# Altium PCB Holiday r2.PcbDoc (part 1 of 3)
Units mil, origin at the board's own origin, x right, y up, seen from the top; angles counter-clockwise.
Board outline 2637.8 x 2637.8 mil, 4 copper layers (Top Layer, Mid-Layer 1, InternalPlane1, Bottom Layer), stack 63.08 mil thick; 132 components, 142 nets, 636 pads, 407 vias.
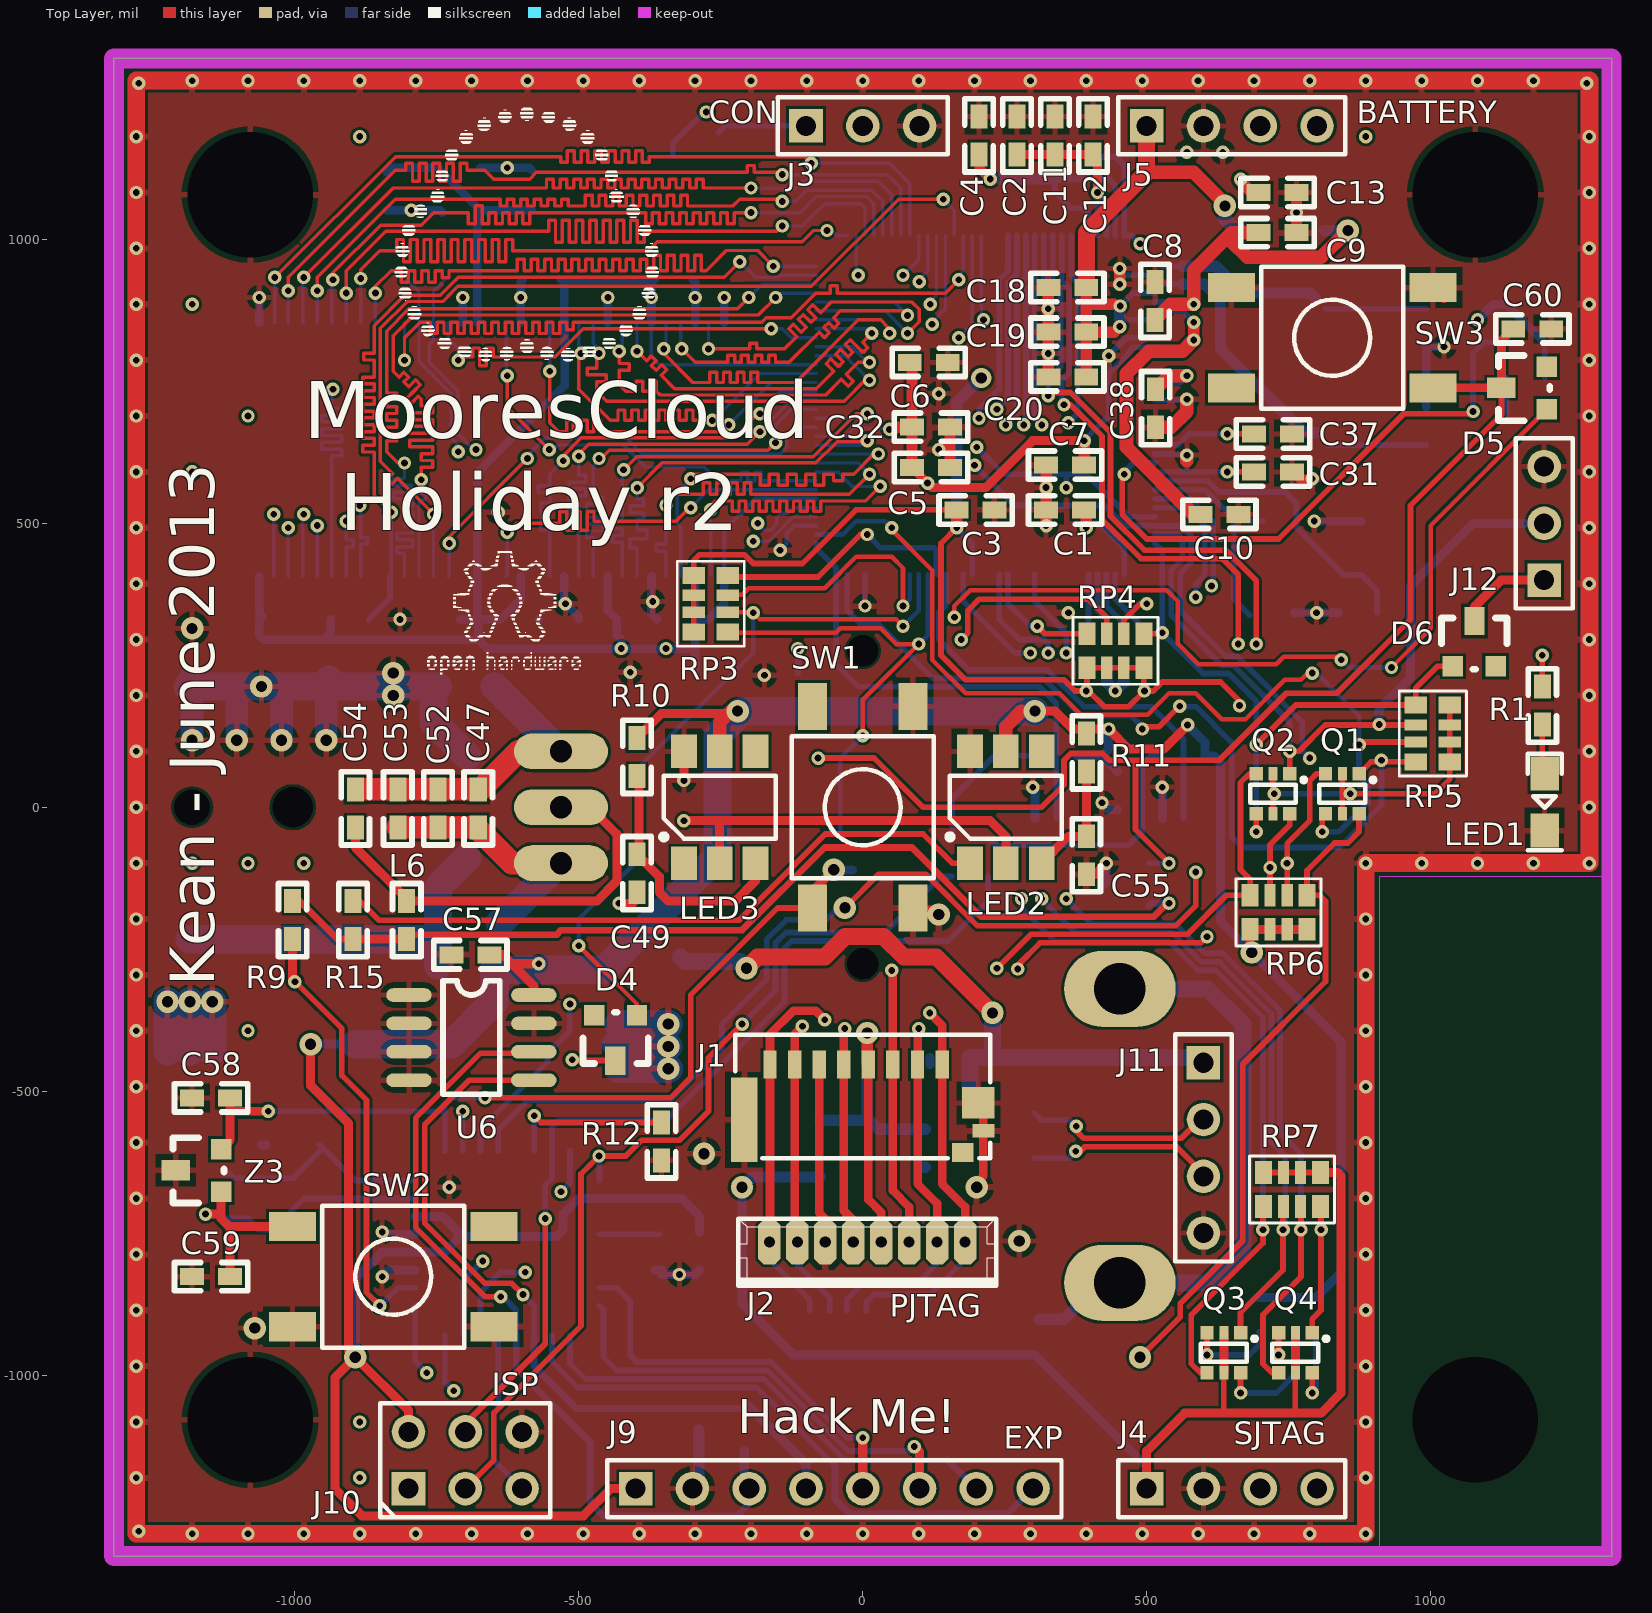
[diagram p0: Top Layer view]
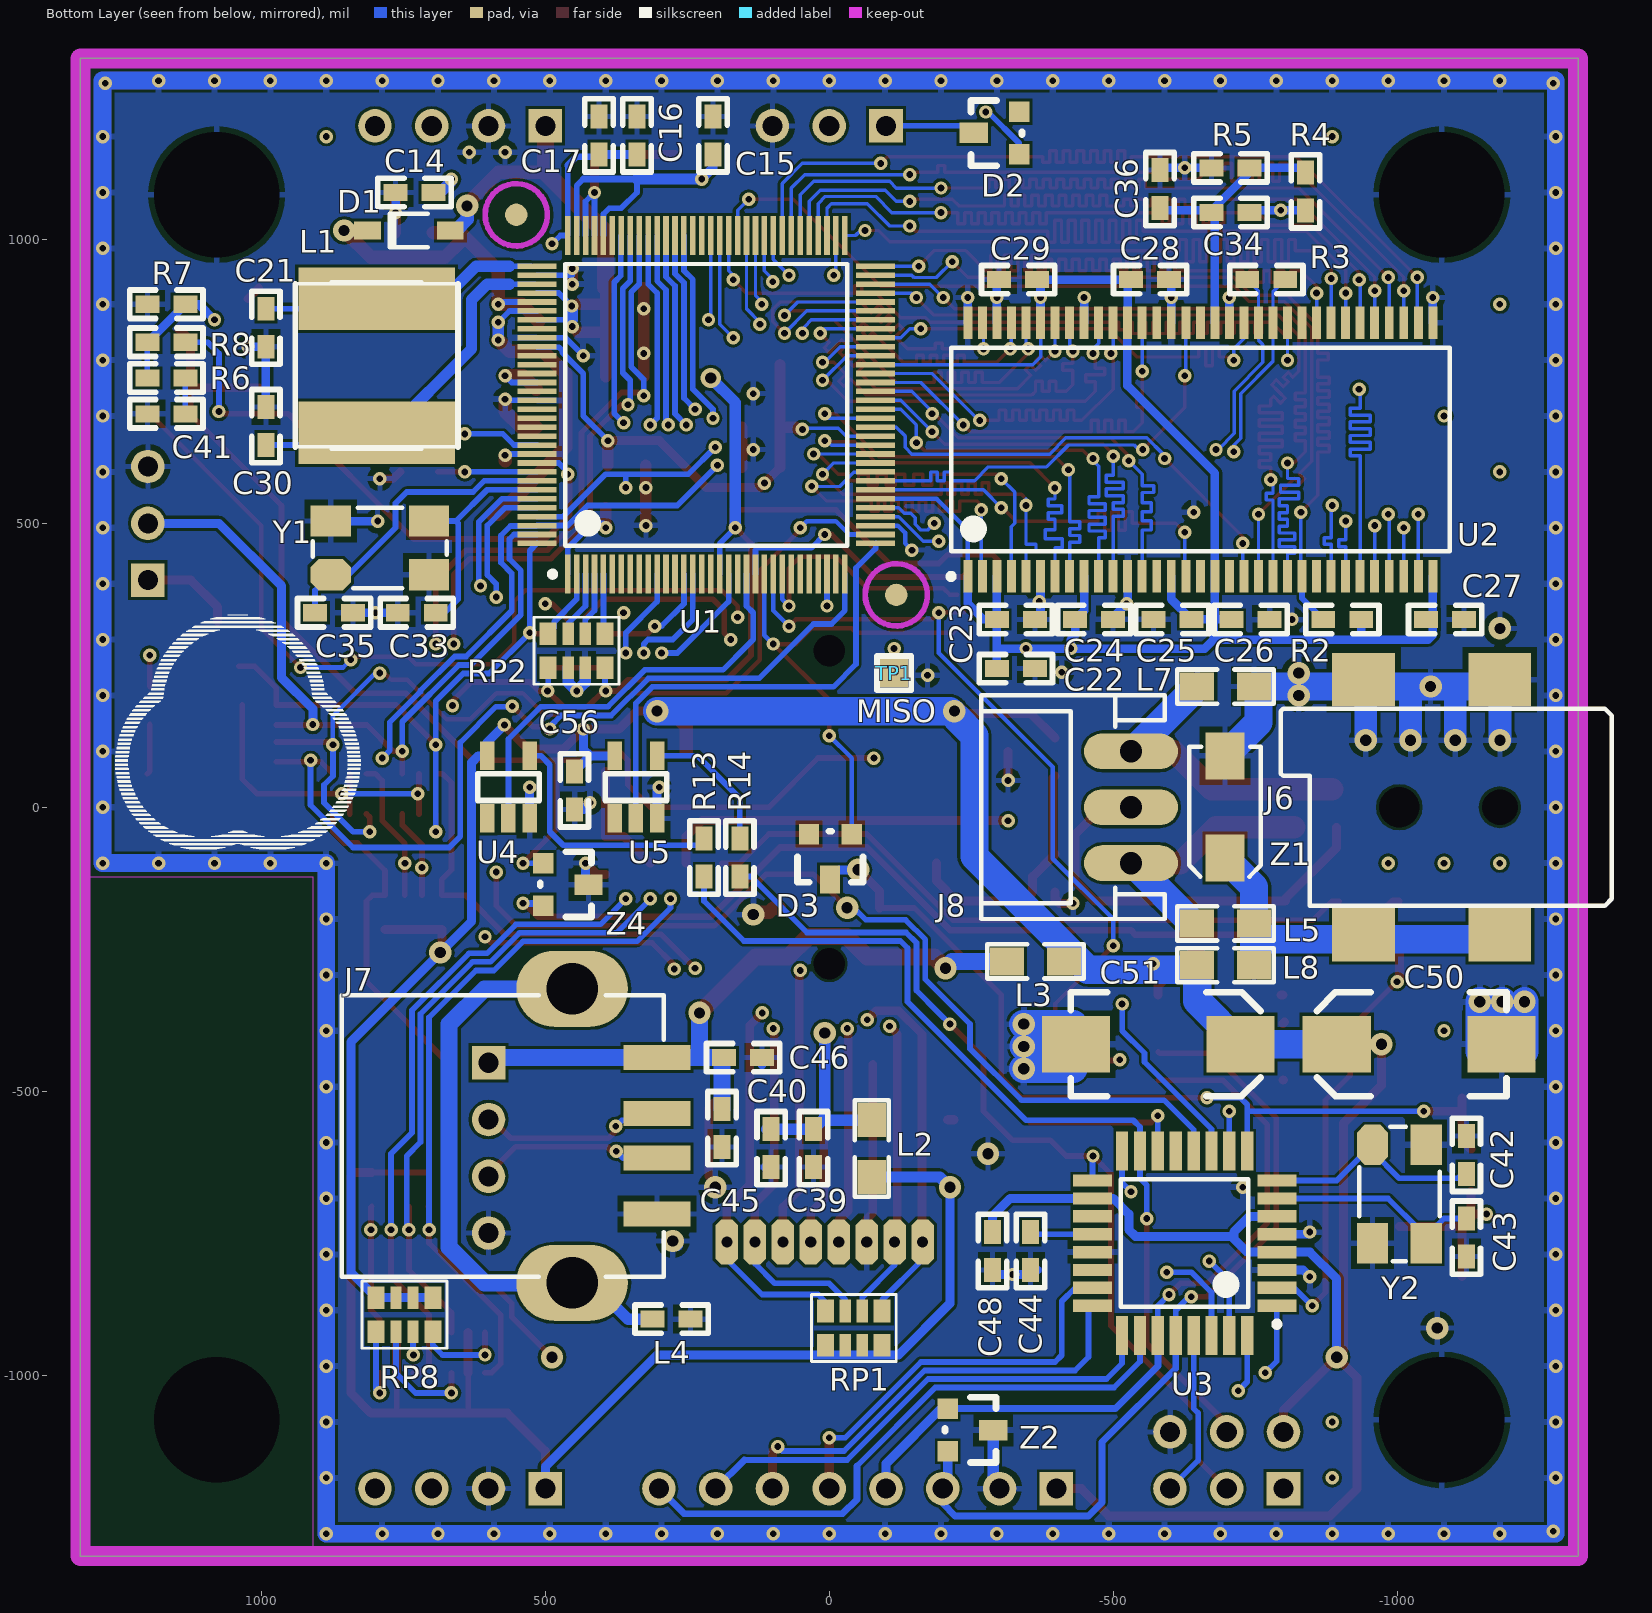
[diagram p1: Bottom Layer view, seen from below]
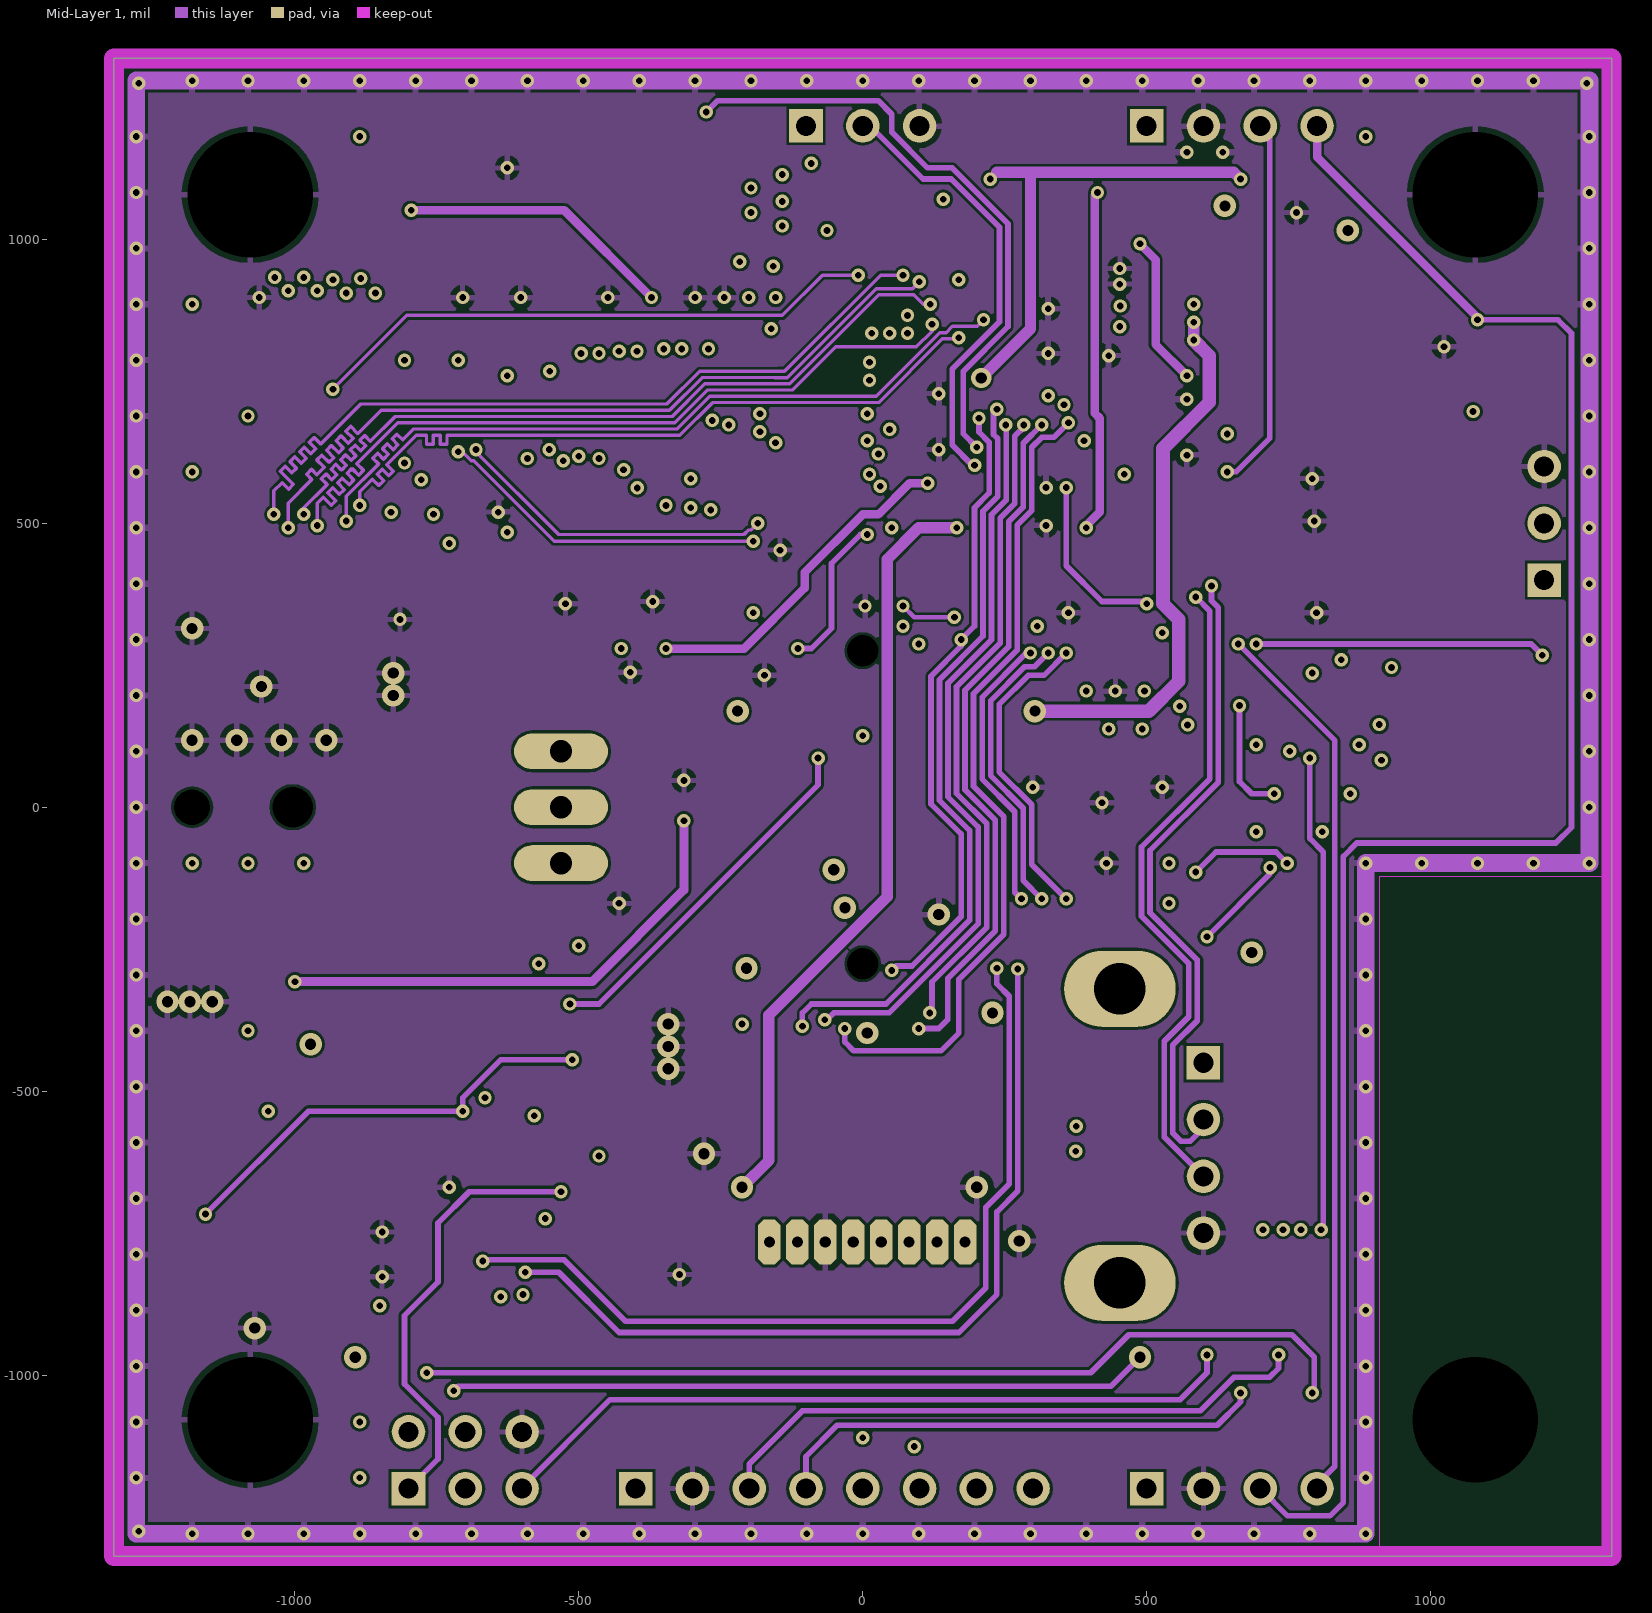
[diagram p2: Mid-Layer 1]
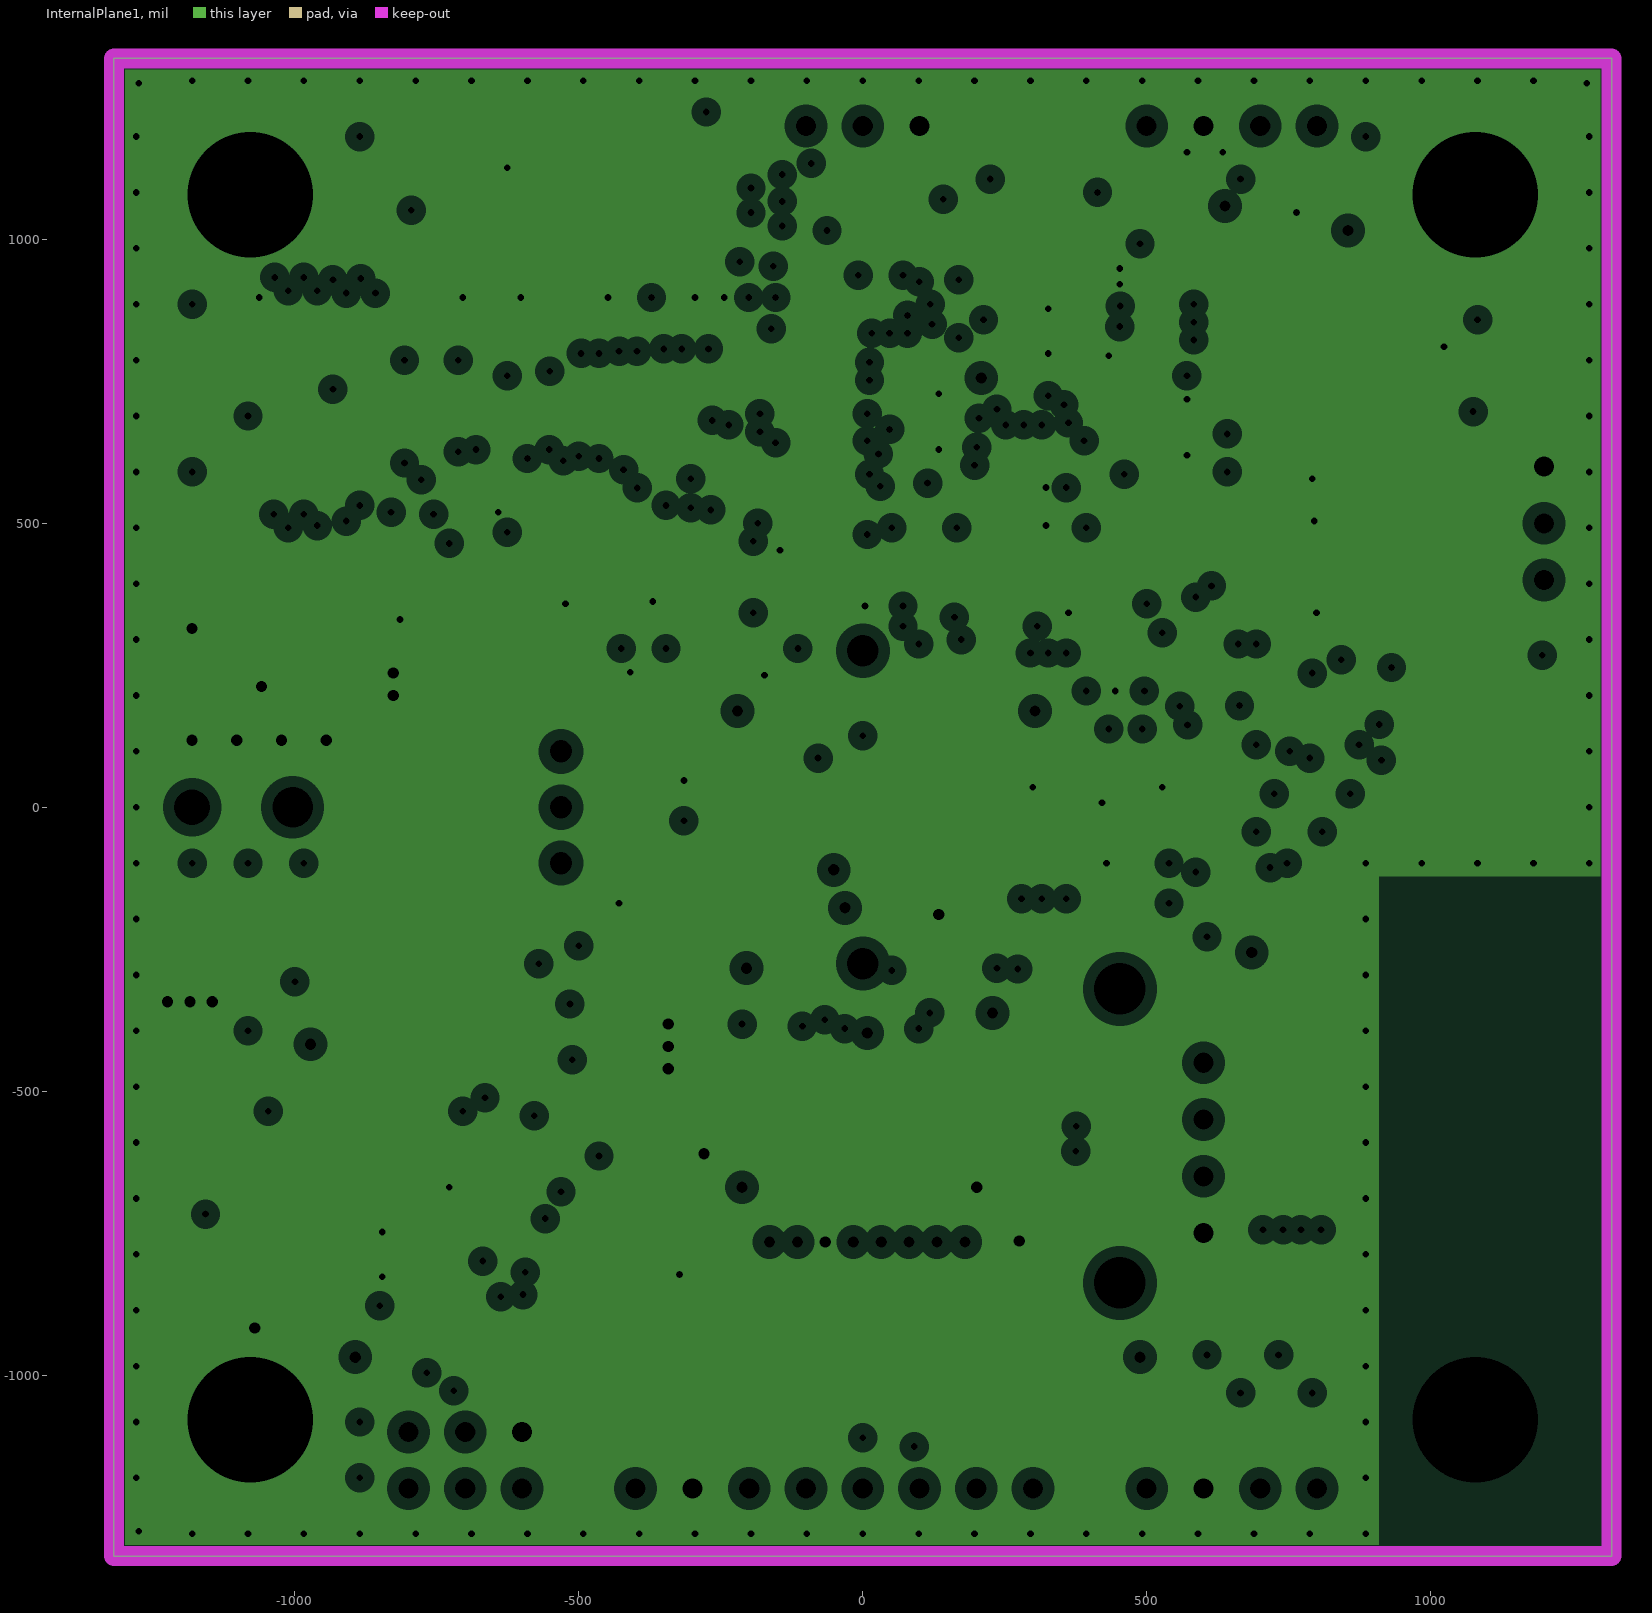
[diagram p3: InternalPlane1, clearances drawn from the general rule]

## Layer stack, top to bottom
Top Layer: signal copper 1.4
Dielectric: prepreg 12.9921, FR-4, Dk 4.8
Mid-Layer 1: signal copper 1.4
Dielectric: prepreg 31.4961, FR-4, Dk 4.8
InternalPlane1: plane copper 1.4, net GND
Dielectric: core 12.9921, FR-4, Dk 4.8
Bottom Layer: signal copper 1.4

## Board outline
-1318.9,-1318.9 -1318.9,1318.9 1318.9,1318.9 1318.9,-1318.9

## Design rules (kind name [scope] priority, off if disabled: settings)
Clearance ClearanceUSB [(InDifferentialPairClass('USB') AND IsTrack)] p1 off: gap=6
Clearance [All] p2: gap=5
DiffPairsRouting [(InNetClass('DDR_CLK') OR InNet('USB_D_N') OR InNet('USB_D_P'))] p1: maxlimit=10 minlimit=10 mostfreqgap=10 maxuncoupledlength=500
HoleSize [All] p1: absolutevalues=TRUE maxlimit=236.22 minlimit=1 maxpercent=80.000 minpercent=20.000
MatchedLengths MatchedLengthsUSB [InNetClass('USB')] p1: tolerance=9.84 checknetsindiffpair=TRUE checkdiffpairvsdiffpair=TRUE checkothers=TRUE
MatchedLengths MatchedLengthsDDR_CLK [InNetClass('DDR_CLK')] p2: tolerance=3.94 checknetsindiffpair=TRUE checkdiffpairvsdiffpair=TRUE checkothers=TRUE
MatchedLengths MatchedLengthsDDR_CTL [(InNetClass('DDR_ADDR') OR InNetClass('DDR_CTL'))] p3: tolerance=19.68 checknetsindiffpair=TRUE checkdiffpairvsdiffpair=TRUE checkothers=TRUE
MatchedLengths MatchedLengthsDDR_DATA [InNetClass('DDR_DATA')] p4: tolerance=9.84 checknetsindiffpair=TRUE checkdiffpairvsdiffpair=TRUE checkothers=TRUE
MaxMinImpedance MaxMinImpedanceUSB [InDifferentialPairClass('USB')] p1: minimum=85.00 maximum=95.00
MinimumSolderMaskSliver [All] p1: minsoldermaskwidth=4
PlaneClearance [All] p1: clearance=20
PlaneConnect [All] p1: planeconnectstyle=Direct reliefexpansion=20 reliefentries=4 reliefconductorwidth=12.01 reliefairgap=10
PolygonConnect [All] p1: connectstyle=Relief reliefconductorwidth=10 reliefentries=4 polygonreliefangle="90 Angle" airgapwidth=10
RoutingVias [All] p1: holewidth=11.81 width=23.62 viastyle="Through Hole" minholewidth=11.81 minwidth=23.62 maxholewidth=39.37 maxwidth=50
SilkToSilkClearance [All] p1: silktosilkclearance=0
SilkToSolderMaskClearance [IsPad] p1: minsilkscreentomaskgap=0.79 clearancetoexposedcopper=TRUE
SolderMaskExpansion [All] p1: expansion=4
Width [All] p1: maxlimit=50 minlimit=6 preferedwidth=10
21 further rules are at their usual default settings.

## Classes and differential pairs
net class D[0..15]: D0 D1 D2 D3 D4 D5 D6 D7 D8 D9 D10 D11 D12 D13 D14 D15
net class A[0..12]: A0 A1 A2 A3 A4 A5 A6 A7 A8 A9 A10 A11 A12
component class "Holiday Aux r2": C42 C43 C44 C45 C46 C47 C48 C49 C50 C51 C52 C53 C54 C55 C57 C58 C59 C60 D3 D4 D5 J6 J7 J8 J9 J10 J11 L3 L4 L5 L6 L7 L8 LED2 LED3 R9 R10 R11 R12 R15 RP3 SW1 SW2 SW3 U3 U6 Y2 Z1 Z2 Z3 Z4
net class DDR_DATA: D0 D1 D2 D3 D4 D5 D6 D7 D8 D9 D10 D11 D12 D13 D14 D15 DQM0 DQM1 DQS0 DQS1
net class DDR_ADDR: A0 A1 A2 A3 A4 A5 A6 A7 A8 A9 A10 A11 A12
differential pair class DDR_CLK: CLK
differential pair class USB: USB_D
net class DDR_CLK: CLK_N CLK_P
net class DDR_CTL: BA0 BA1 CAS_N CKE CS_N RAS_N WE_N
differential pair CLK: +CLK_P -CLK_N
differential pair USB_D: +USB_D_P -USB_D_N

## Components (designator, comment, footprint, x,y, rotation, side; value= is the part's Value field where it differs from the comment)
C1 "22u" ARA_0603 389.76,523.62 r180 top
C2 "22u" ARA_0603 271.65,1149.61 r90 top
C3 "22u" ARA_0603 165.35,523.62 r0 top
C4 "22u" ARA_0603 204.72,1149.61 r90 top
C5 "22u" ARA_0603 86.61,598.43 r0 top
C6 "22u" ARA_0603 82.68,783.46 r0 top
C7 "100n" ARA_0603 389.76,602.36 r180 top
C8 "22u" ARA_0603 514.76,858.27 r90 top
C9 "22u" ARA_0603 696.85,1011.81 r0 top
C10 "22u" ARA_0603 594.49,515.75 r0 top
C11 "22u" ARA_0603 338.58,1149.61 r90 top
C12 "100n" ARA_0603 405.51,1149.61 r90 top
C13 "22u" ARA_0603 696.85,1082.68 r0 top
C14 "22u" ARA_0603 696.85,1082.68 r0 bottom
C15 "100n" ARA_0603 204.72,1149.61 r90 bottom
C16 "22u" ARA_0603 338.58,1149.61 r90 bottom
C17 "100n" ARA_0603 405.51,1149.61 r90 bottom
C18 "22u" ARA_0603 393.7,915.35 r180 top
C19 "22u" ARA_0603 393.7,836.61 r180 top
C20 "22u" ARA_0603 393.7,757.87 r180 top
C21 "10p (DNP)" ARA_0603 992.13,877.95 r270 bottom
C22 "100n" ARA_0603 -295.28,244.09 r180 bottom
C23 "100n" ARA_0603 -295.28,330.71 r180 bottom
C24 "100n" ARA_0603 -433.07,330.71 r180 bottom
C25 "100n" ARA_0603 -637.8,330.71 r0 bottom
C26 "100n" ARA_0603 -708.66,330.71 r180 bottom
C27 "100n" ARA_0603 -1051.18,330.71 r180 bottom
C28 "100n" ARA_0603 -531.5,929.13 r180 bottom
C29 "100n" ARA_0603 -366.14,929.13 r0 bottom
C30 "10p" ARA_0603 992.13,637.8 r90 bottom
C31 "100n" ARA_0603 688.98,590.55 r0 top
C32 "100n" ARA_0603 86.61,669.29 r0 top
C33 "18p" ARA_0603 692.91,342.52 r0 bottom
C34 "100n" ARA_0603 -740.16,1047.24 r0 bottom
C35 "18p" ARA_0603 905.51,342.52 r180 bottom
C36 "100n" ARA_0603 -582.68,1055.12 r90 bottom
C37 "1u" ARA_0603 688.98,657.48 r0 top
C38 "100n" ARA_0603 515.75,736.22 r270 top
C39 "22u" ARA_0603 27.56,-566.93 r270 bottom
C40 "22u" ARA_0603 102.36,-566.93 r270 bottom
C41 "100n" ARA_0603 1133.86,692.91 r0 bottom
C42 "18p" ARA_0603 -1122.05,-645.67 r90 bottom
C43 "18p" ARA_0603 -1122.05,-724.41 r270 bottom
C44 "100n" ARA_0603 -354.33,-748.03 r270 bottom
C45 "22u" ARA_0603 188.98,-531.5 r270 bottom
C46 "100n" ARA_0603 185.04,-440.94 r180 bottom
C47 "100n" ARA_0603 -677.17,31.5 r270 top
C48 "100n" ARA_0603 -287.4,-748.03 r270 bottom
C49 "100n (DNP)" ARA_0603 -397.64,-149.61 r90 top
C50 "100uF, 10V, Tant" ARA_TAJD -893.7,-417.32 r180 bottom
C51 "100uF, 10V, Tant" ARA_TAJD -724.41,-417.32 r0 bottom
C52 "22u" ARA_0603 -748.03,-35.42 r90 top
C53 "22u" ARA_0603 -818.9,-35.42 r90 top
C54 "10p (DNP)" ARA_0603 -893.7,31.48 r270 top
C55 "100n (DNP)" ARA_0603 393.7,-118.11 r90 top
C56 "100n" ARA_0603 448.82,-3.94 r90 bottom
C57 "100n" ARA_0603 -657.48,-259.84 r180 top
C58 "1u (DNP)" ARA_0603 -1181.1,-511.81 r0 top
C59 "1u (DNP)" ARA_0603 -1181.1,-826.77 r0 top
C60 "1u (DNP)" ARA_0603 1212.6,842.52 r180 top
D1 "1N5819 (DNP)" SOD-123 740.16,1015.75 r0 bottom
D2 "BAT54" ARA_SOT-23 -334.65,1149.61 r90 bottom
D3 "BAT54" ARA_SOT-23 -39.37,-47.24 r0 bottom
D4 "BAT54" ARA_SOT-23 -397.64,-366.14 r180 top
D5 "BAT54" ARA_SOT-23 1204.72,700.79 r90 top
D6 "BAT54" ARA_SOT-23 1039.37,248.03 r0 top
J1 "microSD" "MICROSD-47309-3751 WITH CARD" -11.81,-452.76 r0 top locked
J2 "PJTAG" 53047-08 7.87,-783.46 r0 top locked
J3 "CON" HDR1X3 -100,1200 r180 top locked
J4 "SJTAG" HDR1X4 500,-1200 r180 top locked
J5 "BATTERY" HDR1X4 500,1200 r180 top locked
J6 "DC JACK" PJ-002AH-SMT -1003.94,0 r0 bottom locked
J7 "USB A Female" "USB-A-FEMALE-SMT NANO WIFI" 452.76,-578.74 r270 bottom locked
J8 "JST S3B-EH" "JST-EH-S3B WITH PLUG" -531.5,0 r90 bottom locked
J9 "EXP" HDR1X8 -400,-1200 r180 top locked
J10 "ISP" HDR2x3 -800,-1200 r180 top locked
J11 "USBTST" HDR1X4 600,-450 r90 top locked
J12 "ACOM" HDR1X3 1200,400 r270 top
L1 "22uH 1.5A" RCL_L7078 797.24,777.56 r90 bottom
L2 "470nH" ARA_0805 -74.8,-551.18 r270 bottom
L3 "600R 1.5A" ARA_0805 -413.39,-271.65 r0 bottom
L4 "750R 200mA" ARA_0603 244.09,-901.57 r0 bottom
L5 "120R 3.5A" ARA_0805 -748.03,-204.72 r0 bottom
L6 "750R 200mA" ARA_0603 -803.15,-232.28 r90 top
L7 "120R 3.5A" ARA_0805 -748.03,212.6 r0 bottom
L8 "600R 1.5A" ARA_0805 -648,-278 r180 bottom
LED1 "Green (DNP)" LED_0805 1200.79,59.06 r270 top locked
LED2 "WS2812 (DNP)" PLCC6-IPC 251.97,0 r90 top locked
LED3 "WS2812 (DNP)" PLCC6-IPC -251.97,0 r90 top locked
Q1 "BSS138PS" ARA_SOT-363 874.02,59.06 r180 top
Q2 "BSS138PS" ARA_SOT-363 751.97,59.06 r180 top
Q3 "BSS138PS" ARA_SOT-363 665.35,-925.2 r180 top
Q4 "BSS138PS" ARA_SOT-363 791.34,-925.2 r180 top
R1 "1k (DNP)" ARA_0603 1196.85,145.67 r90 top
R2 "10k" ARA_0603 -870.08,330.71 r180 bottom
R3 "120R" ARA_0603 -736.22,929.13 r180 bottom
R4 "1k" ARA_0603 -838.58,1118.11 r270 bottom
R5 "1k" ARA_0603 -740.16,1125.98 r0 bottom
R6 "1k" ARA_0603 1133.86,755.91 r0 bottom
R7 "100k" ARA_0603 1200.79,885.83 r180 bottom
R8 "1k" ARA_0603 1133.86,818.9 r0 bottom
R9 "0R" ARA_0603 -1003.94,-165.35 r270 top
R10 "100R (DNP)" ARA_0603 -397.64,55.12 r90 top
R11 "100R (DNP)" ARA_0603 393.7,62.99 r90 top
R12 "10k" ARA_0603 -354.33,-622.05 r90 top
R13 "1k" ARA_0603 220.47,-122.05 r90 bottom
R14 "1k" ARA_0603 157.48,-122.05 r90 bottom
R15 "0R (DNP)" ARA_0603 -897.64,-232.27 r90 top
RP1 "100k" RESPACK_0603x4 -43.31,-917.32 r270 bottom
RP2 "10k" RESPACK_0603x4 444.88,275.59 r270 bottom
RP3 "10k" RESPACK_0603x4 -267.72,358.27 r180 top
RP4 "10k" RESPACK_0603x4 444.88,275.59 r270 top
RP5 "10k" RESPACK_0603x4 1003.94,129.92 r0 top
RP6 "10k" RESPACK_0603x4 732.28,-185.04 r270 top
RP7 "10k" RESPACK_0603x4 755.91,-673.23 r90 top
RP8 "10k" RESPACK_0603x4 748.03,-893.7 r90 bottom
SW1 "TACTILE_SWITCH" TACTILE_SWITCH_SMD 0,0 r90 top locked
SW2 "TACTILE_SWITCH" TACTILE_SWITCH_SMD -826.77,-826.77 r0 top locked
SW3 "TACTILE_SWITCH" TACTILE_SWITCH_SMD 826.77,826.77 r180 top locked
TP1 "MISO" SMD_TESTTERMINAL -114.17,236.22 r180 bottom
U1 "MCIMX233DAG4B" LQFP128 216.54,708.66 r90 bottom locked
U2 "H5DU5162ETR-E3C" TSOP-II-66 -653.54,629.92 r90 bottom locked
U3 "ATMEGA328" TQFP32 -625.98,-767.72 r0 bottom locked
U4 "MC74VHC1GT50" ARA_SOT-23-5L 602.36,-19.68 r180 bottom
U5 "MC74VHC1GT50" ARA_SOT-23-5L 377.95,-19.68 r180 bottom
U6 "8kB EEPROM" SO-8 -799.21,-330.71 r180 top
Y1 "24Mhz" CRYSTAL_ABMM2 791.34,456.69 r180 bottom
Y2 "16MHz" CRYSTAL_ABMM2 -1003.94,-681.1 r270 bottom
Z1 "SMBJ TVS" ARA_DO-214AC -696.85,90.55 r270 bottom
Z2 "GSOT05C" ARA_SOT-23 -208.66,-1059.06 r270 bottom
Z3 "GSOT05C" ARA_SOT-23 -1129.92,-677.17 r90 top
Z4 "GSOT05C" ARA_SOT-23 503.94,-98.43 r270 bottom

## Footprints (in the part's own frame and the unit in brackets; to place one, negate y for a bottom-side part, rotate by r counter-clockwise, add the part's x,y. Pads: shape width x height; smd on the part's side, far side on the other; paste and mask are expansions set on the pad)
53047-08 [mm]
  oct 1.008x2.016 hole 0.5: 1(4.375,0.45) 2(3.125,0.45) 3(1.875,0.45) 4(0.625,0.45) 5(-0.625,0.45) 6(-1.875,0.45) 7(-3.125,0.45) 8(-4.375,0.45)
  silkscreen extent -5.77,-1.5 5.78,1.5
ARA_0603 [mil]
  rect 42x30 smd: 1(0,0) 2(66.91,0)
  silkscreen extent -31,-25 98,25, body extent 0,-16 67,16, height 20
ARA_0805 [mil]
  rect 60x50 smd: 1(0,0) 2(100,0)
  silkscreen extent -35,-30 135,30, body extent 0,-24 102,24, height 24
ARA_DO-214AC [mm]
  rect 2.1x1.75 smd: 1(0,0) 2(4.572,0)
  silkscreen extent -0.4,-1.6 5.4,1.6, body extent -0.4,-1.6 4.9,1.6, height 2.3
ARA_SOT-23 [mil]
  rect 36x36 smd: 1(0,0) 2(75,0)
  rect 36x50 smd: 3(38,80)
  silkscreen extent -20,-5 95,85, body extent -26,8 101,71, height 39
ARA_SOT-23-5L [mm]
  rect 0.65x1.27 smd: 1(0,0) 2(0.95,0) 3(1.9,0) 4(1.9,2.8) 5(0,2.8)
  silkscreen extent -0.43,0.8 2.32,2, body extent -0.42,0.8 2.32,2, height 1.45
ARA_SOT-363 [mm] "SOT-363/SC-88"
  rect 0.6x0.6 smd paste-0.05 mask+0.05: 1(0,0) 3(1.5,0) 4(1.5,1.8) 6(0,1.8)
  rect 0.4x0.6 smd paste-0.05 mask+0.05: 2(0.75,0) 5(0.75,1.8)
  silkscreen extent -0.72,0.18 1.78,1.3, body extent -0.25,0.25 1.75,1.55, height 0.95
ARA_TAJD [mil]
  rect 120x100 smd: 1(0,0) 2(290,0)
  silkscreen extent -35,-92 299,92, body extent 0,-85 287,85, height 115
CRYSTAL_ABMM2 [mm] "Abracon ABMM2 Low Profile Quartz Crystal"
  oct 1.8x1.4 smd: 1(-2.2,-1.2)
  rect 1.8x1.4 smd: 2(2.2,-1.2) 3(2.2,1.2) 4(-2.2,1.2)
  silkscreen extent -3,-1.8 3,1.8, body extent -3,-1.8 3,1.8, height 1.2
HDR1X3 [mm] "Connector; Header; 3 Position"
  rect 1.5x1.5 hole 0.9: 1(0,0)
  round 1.5 hole 0.9: 2(-2.54,0) 3(-5.08,0)
  silkscreen extent -6.35,-1.27 1.27,1.27
HDR1X4 [mm] "Connector; Header; 4 Position"
  rect 1.5x1.5 hole 0.9: 1(0,0)
  round 1.5 hole 0.9: 2(-2.54,0) 3(-5.08,0) 4(-7.62,0)
  silkscreen extent -8.89,-1.27 1.27,1.27
HDR1X8 [mm] "Connector; Header; 8 Position"
  rect 1.5x1.5 hole 0.9: 1(0,0)
  round 1.5 hole 0.9: 2(-2.54,0) 3(-5.08,0) 4(-7.62,0) 5(-10.16,0) 6(-12.7,0) 7(-15.24,0) 8(-17.78,0)
  silkscreen extent -19.05,-1.27 1.27,1.27
HDR2x3 [mm] "Connector; Header; 6 Position; Dual Row"
  rect 1.5x1.5 hole 0.9: 1(0,0)
  round 1.5 hole 0.9: 2(0,-2.54) 3(-2.54,0) 4(-2.54,-2.54) 5(-5.08,0) 6(-5.08,-2.54)
  silkscreen extent -6.35,-3.81 1.27,1.27
"JST-EH-S3B WITH PLUG" [mm] "JST EH Side Entry 3 way - with plug"
  oval 1.6x4.2 hole 1: 1(-2.5,0) 2(0,0) 3(2.5,0)
  silkscreen extent -5,-1.5 5,6.7, body extent -5,-1.5 5,8.85, height 4.35
LED_0805 [mil]
  rect 60x50 smd: A(0,0) K(100,0)
  silkscreen extent -35,-30 135,30, body extent 0,-24 102,24, height 24
LQFP128 [mm] "LQFP, 128-Leads, Body 14.00x14.00mm, Pitch 0.40mm, IPC Medium Density"
  rect 1.75x0.25 smd: 1(-7.575,6.2) 2(-7.575,5.8) 3(-7.575,5.4) 4(-7.575,5) 5(-7.575,4.6) 6(-7.575,4.2) 7(-7.575,3.8) 8(-7.575,3.4) 9(-7.575,3) 10(-7.575,2.6) 11(-7.575,2.2) 12(-7.575,1.8) 13(-7.575,1.4) 14(-7.575,1) 15(-7.575,0.6) 16(-7.575,0.2) 17(-7.575,-0.2) 18(-7.575,-0.6) 19(-7.575,-1) 20(-7.575,-1.4) 21(-7.575,-1.8) 22(-7.575,-2.2) 23(-7.575,-2.6) 24(-7.575,-3) 25(-7.575,-3.4) 26(-7.575,-3.8) 27(-7.575,-4.2) 28(-7.575,-4.6) 29(-7.575,-5) 30(-7.575,-5.4) 31(-7.575,-5.8) 32(-7.575,-6.2) 65(7.575,-6.2) 66(7.575,-5.8) 67(7.575,-5.4) 68(7.575,-5) 69(7.575,-4.6) 70(7.575,-4.2) 71(7.575,-3.8) 72(7.575,-3.4) 73(7.575,-3) 74(7.575,-2.6) 75(7.575,-2.2) 76(7.575,-1.8) 77(7.575,-1.4) 78(7.575,-1) 79(7.575,-0.6) 80(7.575,-0.2) 81(7.575,0.2) 82(7.575,0.6) 83(7.575,1) 84(7.575,1.4) 85(7.575,1.8) 86(7.575,2.2) 87(7.575,2.6) 88(7.575,3) 89(7.575,3.4) 90(7.575,3.8) 91(7.575,4.2) 92(7.575,4.6) 93(7.575,5) 94(7.575,5.4) 95(7.575,5.8) 96(7.575,6.2)
  rect 0.25x1.75 smd: 33(-6.2,-7.575) 34(-5.8,-7.575) 35(-5.4,-7.575) 36(-5,-7.575) 37(-4.6,-7.575) 38(-4.2,-7.575) 39(-3.8,-7.575) 40(-3.4,-7.575) 41(-3,-7.575) 42(-2.6,-7.575) 43(-2.2,-7.575) 44(-1.8,-7.575) 45(-1.4,-7.575) 46(-1,-7.575) 47(-0.6,-7.575) 48(-0.2,-7.575) 49(0.2,-7.575) 50(0.6,-7.575) 51(1,-7.575) 52(1.4,-7.575) 53(1.8,-7.575) 54(2.2,-7.575) 55(2.6,-7.575) 56(3,-7.575) 57(3.4,-7.575) 58(3.8,-7.575) 59(4.2,-7.575) 60(4.6,-7.575) 61(5,-7.575) 62(5.4,-7.575) 63(5.8,-7.575) 64(6.2,-7.575) 97(6.2,7.575) 98(5.8,7.575) 99(5.4,7.575) 100(5,7.575) 101(4.6,7.575) 102(4.2,7.575) 103(3.8,7.575) 104(3.4,7.575) 105(3,7.575) 106(2.6,7.575) 107(2.2,7.575) 108(1.8,7.575) 109(1.4,7.575) 110(1,7.575) 111(0.6,7.575) 112(0.2,7.575) 113(-0.2,7.575) 114(-0.6,7.575) 115(-1,7.575) 116(-1.4,7.575) 117(-1.8,7.575) 118(-2.2,7.575) 119(-2.6,7.575) 120(-3,7.575) 121(-3.4,7.575) 122(-3.8,7.575) 123(-4.2,7.575) 124(-4.6,7.575) 125(-5,7.575) 126(-5.4,7.575) 127(-5.8,7.575) 128(-6.2,7.575)
  silkscreen extent -7.7,-6.3 6.3,7, body extent -7,-7 7,7, height 1.6
"MICROSD-47309-3751 WITH CARD" [mm] "Molex MicroSD Connector - Push/Pull - 3.75mm with Card"
  rect 0.6x1.25 smd: 1(3.85,0) 2(2.75,0) 3(1.65,0) 4(0.55,0) 5(-0.55,0) 6(-1.65,0) 7(-2.75,0) 8(-3.85,0)
  rect 1.2x3.79 smd: G1(-5,-2.48)
  rect 1.45x1.4 smd: G2(5.475,-1.725)
  rect 1x0.6 smd: G3(5.7,-2.975)
  rect 0.95x0.85 smd: G4(4.775,-3.95)
  silkscreen extent -5.4,-4.2 6,1.32, body extent -5.4,-14 6.1,1.4, height 3.75
PJ-002AH-SMT [mm] "CUI High Current SMT DC Jack"
  round 0 hole 1.6 unplated: 0(-4.5,0)
  round 0 hole 1.8 unplated: 0(0,0)
  rect 2.8x2.4 smd: 1(-4.5,5.7) 1(1.6,5.7) 2(-4.5,-5.7) 3(1.6,-5.7)
  silkscreen extent -9.5,-4.4 5.3,4.4, body extent -9.5,-6.3 5.3,6.3, height 11.2
PLCC6-IPC [mm] "Leaded Chip Carrier, 12-Leads, Body 9.90x5.40mm, Pitch 1.600mm, IPC Medium Density"
  rect 1.5x1.15 smd: 1(-2.5,1.6) 2(-2.5,0) 3(-2.5,-1.6) 4(2.5,-1.6) 5(2.5,0) 6(2.5,1.6)
  silkscreen extent -1.45,-2.5 1.4,2.62, body extent -2.5,-2.5 2.5,2.5, height 1.61
RCL_L7078 [mm] "7x7.8mm Inductor"
  rect 2.8x7 smd: 1(3,0) 2(-3,0)
  silkscreen extent -3.73,-3.64 3.76,3.64, body extent -3.8,-3.6 3.8,3.6, height 4.5
RESPACK_0603x4 [mil] "Resistor Pack 0603 x 4 (1206)"
  rect 40x30 smd: 1.1(-30,50) 1.2(30,50) 4.1(-30,-50) 4.2(30,-50)
  rect 40x20 smd: 2.1(-30,15) 2.2(30,15) 3.1(-30,-15) 3.2(30,-15)
  silkscreen extent -59,-75 59,75, body extent -40,-66 43,67, height 26
SMD_TESTTERMINAL [mil]
  rect 50x50 smd paste-78.74: 1(0,0)
  silkscreen extent -30,-30 30,30
SO-8 [mil]
  oval 80x24 smd: 1(0,0) 2(0,50) 3(0,100) 4(0,150) 5(-220,150) 6(-220,100) 7(-220,50) 8(-220,0)
  silkscreen extent -160,-25 -60,175
SOD-123 [mm] "SOD-123; 2 Leads; Body 2.7 x 1.6 mm, (LxW)"
  rect 1.2x0.8 smd: 1(-1.85,0) 2(1.85,0)
  silkscreen extent -0.85,-0.75 0.85,0.75
TACTILE_SWITCH_SMD [mm]
  rect 2.1x1.3 smd: 1(-4.51,2.24) 2(4.51,2.24) 3(-4.51,-2.24) 4(4.51,-2.24)
  silkscreen extent -3.17,-3.18 3.18,3.17, body extent -5,-3 5,3, height 5.1
TQFP32 [mm] "TQFP, 32-Leads, Body 7.00x7.00mm, Pitch 0.80mm, IPC Medium Density"
  rect 1.75x0.55 smd: 1(-4.125,2.8) 2(-4.125,2) 3(-4.125,1.2) 4(-4.125,0.4) 5(-4.125,-0.4) 6(-4.125,-1.2) 7(-4.125,-2) 8(-4.125,-2.8) 17(4.125,-2.8) 18(4.125,-2) 19(4.125,-1.2) 20(4.125,-0.4) 21(4.125,0.4) 22(4.125,1.2) 23(4.125,2) 24(4.125,2.8)
  rect 0.55x1.75 smd: 9(-2.8,-4.125) 10(-2,-4.125) 11(-1.2,-4.125) 12(-0.4,-4.125) 13(0.4,-4.125) 14(1.2,-4.125) 15(2,-4.125) 16(2.8,-4.125) 25(2.8,4.125) 26(2,4.125) 27(1.2,4.125) 28(0.4,4.125) 29(-0.4,4.125) 30(-1.2,4.125) 31(-2,4.125) 32(-2.8,4.125)
  silkscreen extent -4.25,-2.85 2.85,3.75, body extent -3.5,-3.5 3.5,3.5, height 1.2
TSOP-II-66 [mm] "TSOP, 66-Leads, Body 22.22x10.16mm, Pitch 0.65mm, IPC Medium Density"
  rect 1.45x0.4 smd: 1(-5.675,10.4) 2(-5.675,9.75) 3(-5.675,9.1) 4(-5.675,8.45) 5(-5.675,7.8) 6(-5.675,7.15) 7(-5.675,6.5) 8(-5.675,5.85) 9(-5.675,5.2) 10(-5.675,4.55) 11(-5.675,3.9) 12(-5.675,3.25) 13(-5.675,2.6) 14(-5.675,1.95) 15(-5.675,1.3) 16(-5.675,0.65) 17(-5.675,0) 18(-5.675,-0.65) 19(-5.675,-1.3) 20(-5.675,-1.95) 21(-5.675,-2.6) 22(-5.675,-3.25) 23(-5.675,-3.9) 24(-5.675,-4.55) 25(-5.675,-5.2) 26(-5.675,-5.85) 27(-5.675,-6.5) 28(-5.675,-7.15) 29(-5.675,-7.8) 30(-5.675,-8.45) 31(-5.675,-9.1) 32(-5.675,-9.75) 33(-5.675,-10.4) 34(5.675,-10.4) 35(5.675,-9.75) 36(5.675,-9.1) 37(5.675,-8.45) 38(5.675,-7.8) 39(5.675,-7.15) 40(5.675,-6.5) 41(5.675,-5.85) 42(5.675,-5.2) 43(5.675,-4.55) 44(5.675,-3.9) 45(5.675,-3.25) 46(5.675,-2.6) 47(5.675,-1.95) 48(5.675,-1.3) 49(5.675,-0.65) 50(5.675,0) 51(5.675,0.65) 52(5.675,1.3) 53(5.675,1.95) 54(5.675,2.6) 55(5.675,3.25) 56(5.675,3.9) 57(5.675,4.55) 58(5.675,5.2) 59(5.675,5.85) 60(5.675,6.5) 61(5.675,7.15) 62(5.675,7.8) 63(5.675,8.45) 64(5.675,9.1) 65(5.675,9.75) 66(5.675,10.4)
  silkscreen extent -5.8,-11.15 4.55,11.28, body extent -5.15,-11.15 5.15,11.15, height 1.2
"USB-A-FEMALE-SMT NANO WIFI" [mm] "USB A Socket SMT - with Nano WiFi Module"
  rect 1.12x3 smd: 1(-3.5,3.8) 2(-1,3.8) 3(1,3.8) 4(3.5,3.8)
  oval 3.4x5 hole 2.3: G1(-6.575,0) G2(6.575,0)
  silkscreen extent -6.3,-10.3 6.3,4.1, body extent -7.8,-20.4 7.8,4.96, height 7.7

## Part data
C1 C2 C3 C4 C5 C6 C7 C8 C9 C10 C11 C12 C13 C14 C15 C16 C17 C18 C19 C20 C21 C22 C23 C24 C25 C26 C27 C28 C29 C30 C31 C32 C33 C34 C35 C36 C37 C38 C39 C40 C41 C42 C43 C44 C45 C46 C47 C48 C49 C52 C53 C54 C55 C56 C57 C58 C59 C60: library part CAP, "Capacitor"
C50 C51: library part "Cap Pol3", "Polarized Capacitor (Surface Mount)"
D1: library part "DIODE SCHOTTKY", "Schottky Diode 1N5819HW (DNP)"
D2 D3 D4 D5 D6: "Schottky Diode"
J1: "microSD Socket Push/Pull"
J2 J9: library part CON8, "Connector"
J3 J8 J12: library part CON3, "Connector"
J4 J5 J11: library part CON4, "Connector"
J6: library part DCJACK
J7: library part USB_A_FEMALE
J10: library part CON6, "Connector"
L1: library part Inductor, "Inductor"
L2 L3 L4 L5 L6 L7 L8: library part Inductor, "Ferrite"
LED1: library part LED, "LED"
LED2 LED3: library part WS2812, "WorldSemi WS2812 Smart RGB LED"
Q1 Q2 Q3 Q4: "Dual N Channel MOSFET"
R1 R2 R3 R4 R5 R6 R7 R8 R9 R10 R11 R12 R13 R14 R15: library part "Res Semi", "Resistor"
RP1 RP2: library part RESISTOR_PACK_4_1206, "Resistor Pack 4x0603"
RP3 RP4 RP5 RP6 RP7 RP8: library part RESISTOR_PACK_4_1206_SPLIT, "Resistor Pack 4x0603"
SW1 SW2 SW3: "Pushbutton SMT"
TP1: library part TESTTERMINAL, "Test Point"
U1: "Freescale i.MX233 128 pin LQFP package"
U2: "SDRAM DDR400 66TSOP-II"
U3: library part ATMEGA328-TQFP32, "ATMEGA328 - TQFP"
U4 U5: "CMOS Logic Level Shifter"
U6: library part "EEPROM I2C", "CAT24C64W EEPROM I2C"
Y1 Y2: library part CRYSTAL_ABMM2, "ABMM2 SMD Crystal"
Z1: library part "TVS SMBJ", "SMBJ Unidirectional TVS"
Z2 Z3 Z4: library part GSOT03C, "Two-Line ESD-Protection in SOT23"

## Free pads (board coordinates)
  round 0 hole 220.47: 0(-1078.74,-1078.74) 0(-1078.74,1078.74) 0(1078.74,1078.74)
  round 0 hole 55.12 unplated: 0(0,-275.59) 0(0,275.59)
  round 0 hole 220.47 unplated: 0(1078.74,-1078.74)
  round 39.37 smd far side paste-39.37 mask+39.37: 1(-118.11,374.02) 2(551.18,1043.31)

## Via types
v1: diameter 23.62, hole 11.81, Top Layer to Bottom Layer, tented both sides, 373 vias
v2: diameter 39.37, hole 19.68, Top Layer to Bottom Layer, tented both sides, 33 vias
v3: diameter 35.43, hole 19.68, Top Layer to Bottom Layer, tented both sides, 1 vias

## Nets (pads, with @x,y where several pads share a name; then routed paths per layer and width w, separated by ;. In a path a pad name is that pad's centre, name@x,y a point inside that pad or via, vN(x,y) a via of type N, cw(c..) or ccw(c..) an arc to the next point about the centre after c; other vN are vias at no path point)
2V5: C5.1 C6.1 C7.1 C22.1 C23.1 C24.1 C25.1 C26.1 C27.1 C28.1 C29.1 C32.1 C34.1 R2.2 R4.2 U1.38 U1.45 U1.53 U1.106 U2.1 U2.3 U2.9 U2.15 U2.18 U2.33 U2.55 U2.61 | length 5269.2
  Top Layer w15.98: C5.1@86.61,598.42 v1(114.17,570.87) 122.05,562.99 216.54,562.99 299.21,645.67 v1(389.76,645.67)
  Top Layer w20: v1(47.24,665.35) 55.12,665.35 59.06,669.29 C32.1@86.61,669.29 ; C5.1@86.61,598.42 C32.1@86.61,669.29 ; C6.1@86.61,779.53 C32.1@86.61,669.29 ; C7.1@389.76,602.36 v1(389.76,645.67)
  Mid-Layer 1 w15: v1(-795.28,1051.2) -525.61,1051.2 v1(-372.05,897.64) ; v1(-346.46,279.53) -208.66,279.53 -102.36,385.83 -102.36,413.39 0,515.75 27.56,515.75 82.68,570.87 v1(114.17,570.87)
  Bottom Layer w6: U2.61@-372.05,853.35 -372.2,853.19 -372.2,793.46 -358.27,779.53 U1.53@-81.69,779.53 ; U1.45@-81.69,653.54 -29.97,653.54 -16.19,667.32 45.28,667.32 v1(47.24,665.35)
  Bottom Layer w8: U2.1@-244.09,406.5 -244.09,488.19 -188.98,543.31 U1.38@-81.69,543.31
  Bottom Layer w10: v1(389.76,645.67) 433.07,688.98 433.07,763.78 470.31,801.02 470.31,804.34 476.17,810.2 513.94,810.2 U1.106@514.76,811.02
  Bottom Layer w15: C27.1@-1062.99,330.71 -1062.99,303.15 -1055.12,295.28 -948.8,295.28 ; U2.33@-1062.99,406.5 -1062.99,342.52 C27.1@-1057.09,336.61 ; R2.2@-936.99,330.71 -936.99,307.09 -948.8,295.28 ; R4.2@-838.58,1051.2 v1(-795.28,1051.2) -744.11,1051.2 C34.1@-740.16,1047.24 ; C26.1@-708.66,330.71 -677.17,330.71 ; U2.15@-602.36,406.5 -602.36,366.14 C25.1@-637.79,330.71 ; U2.55@-525.59,853.35 -525.59,923.23 C28.1@-531.5,929.13 C29.1@-366.14,929.13 ; U2.55@-525.06,858.27 -525.06,742.65 -679.13,588.58 U2.18@-679.13,406.5 -679.13,332.68 -677.17,330.71 ; U2.9@-448.82,406.5 -448.82,346.46 C24.1@-433.07,330.71 -433.07,303.15 -425.2,295.28 v1(-425.2,279.53) ; U2.61@-372.05,853.35 v1(-372.05,897.64) C29.1@-372.05,923.23 ; C22.1@-295.28,244.09 -295.28,279.53 ; U2.3@-295.28,406.5 C23.1@-295.28,330.71 ; U2.1@-244.09,406.5 -244.09,358.27 -271.65,330.71 C23.1@-295.28,330.71 ; -948.8,295.28 -677.17,295.28 ; -677.17,295.28 -661.42,279.53 v1(-425.2,279.53) ; -677.17,295.28 -677.17,330.71 ; -677.17,330.71 C25.1@-637.79,330.71 ; -677.17,330.71 C25.1@-637.79,330.71 ; v1(-425.2,279.53) v1(-346.46,279.53) -295.28,279.53 ; -295.28,279.53 C23.1@-295.28,330.71
3V3: C3.1 C4.1 C13.1 C14.1 C15.1 J4.1 L2.2 Q1.2 Q1.5 Q2.2 Q2.5 Q3.2 Q3.5 Q4.2 Q4.5 RP1.1.2 RP1.2.2 RP1.3.2 RP1.4.2 RP2.1.2 RP2.4.2 RP3.1.2 RP3.2.2 RP3.3.2 RP3.4.2 RP4.1.2 RP4.2.2 RP4.3.2 RP4.4.2 RP5.1.2 RP5.2.2 RP5.3.2 RP5.4.2 RP7.1.2 RP7.2.2 RP7.3.2 RP7.4.2 U1.18 U1.92 U1.95 | length 8254.4
  Top Layer w10: RP3.1.2@-297.72,308.27 RP3.2.2@-297.72,343.27 RP3.3.2@-297.72,373.27 RP3.4.2@-297.72,408.27 -297.72,434.57 -287.4,444.88 -208.66,444.88 -192.91,429.13 -106.3,429.13 -11.81,523.62 C3.1@165.35,523.62 ; v1(165.35,492.13) 137.8,464.57 137.8,267.72 181.1,224.41 354.33,224.41 374.02,204.72 v1(393.7,204.72) 397.64,204.72 425.2,177.17 468.5,177.17 v1(496.06,204.72) 511.81,204.72 527.56,220.47 629.92,220.47 663.52,186.87 v1(663.52,179) ; v1@394.88,205.9 RP4.4.2@394.88,245.59 RP4.3.2@429.88,245.59 RP4.2.2@459.88,245.59 RP4.1.2@494.88,245.59 v1@494.88,205.91 ; 635.83,-1066.93 Q3.5@635.83,-996.06 ; RP7.1.2@705.91,-643.23 RP7.2.2@740.91,-643.23 RP7.3.2@770.91,-643.23 RP7.4.2@805.91,-643.23 ; Q2.5@722.44,-11.81 v1@722.44,23.62 ; Q2.2@722.44,59.05 v1@722.44,23.62 ; v1(724.41,23.62) v1@722.44,23.62 ; 761.81,-1066.93 Q4.5@761.81,-996.06 ; Q1.5@844.49,-11.81 Q1.2@844.49,59.06 ; v1(858.27,23.62) 1007.87,23.62 1033.94,49.68 RP5.4.2@1033.94,79.92 RP5.3.2@1033.94,114.92 RP5.2.2@1033.94,144.92 RP5.1.2@1033.94,179.92
  Top Layer w15.98: J4.1@500,-1200 500,-1133.86 566.93,-1066.93 635.83,-1066.93 761.81,-1066.93 807.09,-1066.93 842.52,-1031.5 842.52,-649.61 836.14,-643.23 RP7.4.2@805.91,-643.23 ; Q3.5@635.83,-996.06 Q3.2@635.83,-925.2 ; Q4.5@761.81,-996.06 Q4.2@761.81,-925.2
  Top Layer w16: C4.1@204.72,1149.61 204.72,1125.98 v1(224.41,1106.3)
  Top Layer w20: v1(165.35,492.13) C3.1@165.35,523.62 ; v1(665.35,1106.3) 665.35,1102.36 685.04,1082.68 C13.1@696.85,1082.68
  Mid-Layer 1 w10: v1(663.52,179) 663.52,45.14 685.04,23.62 v1(724.41,23.62)
  Mid-Layer 1 w15: v1(224.41,1106.3) 236.22,1118.11
  Mid-Layer 1 w20: v2(-212.6,-669.29) -165.35,-622.05 -165.35,-366.14 43.31,-157.48 43.31,437.01 98.43,492.13 v1(165.35,492.13) ; v3(208.66,755.91) 295.28,842.52 295.28,1106.99 ; 236.22,1118.11 653.54,1118.11 v1(665.35,1106.3)
  Bottom Layer w10: v1(165.35,492.13) 192.91,464.57 U1.18@192.91,410.43 ; 338.58,1106.3 338.58,1082.68 366.14,1055.12 387.17,1055.12 397.64,1044.65 U1.92@397.64,1006.89 ; v1(393.7,204.72) 394.88,205.91 RP2.1.2@394.88,245.59 ; 433.07,1106.3 444.88,1094.49 U1.95@444.88,1006.89 ; RP2.4.2@494.88,245.59 494.88,205.9 v1(496.06,204.72) ; v1(724.41,23.62) v1(858.27,23.62)
  Bottom Layer w12: 338.58,1106.3 433.07,1106.3
  Bottom Layer w15.98: v2(-212.6,-669.29) -212.6,-874.02 -122.05,-964.57 303.15,-964.57 500,-1161.42 J4.1@500,-1200
  Bottom Layer w16: C15.1@204.72,1149.61 204.72,1125.98 v1(224.41,1106.3)
  Bottom Layer w20: v2(-212.6,-669.29) -194.49,-651.18 L2.2@-74.8,-651.18 ; v1(165.35,492.13) 165.35,712.6 v3(208.66,755.91) ; v1(224.41,1106.3) 338.58,1106.3 ; v1(665.35,1106.3) 665.35,1102.36 685.04,1082.68 C14.1@696.85,1082.68
5V: C10.1 C48.1 C50.1 C51.1 C56.2 C57.1 J9.1 J10.2 L3.1 L8.1 LED2.5 LED3.5 R10.2 R11.2 RP6.1.2 RP6.2.2 RP6.3.2 RP6.4.2 RP8.1.2 RP8.2.2 RP8.3.2 RP8.4.2 U1.102 U3.4 U3.6 U3.18 U4.5 U5.5 U6.8 | length 8115
  Top Layer w15.98: v2(-972.44,-417.32) -972.44,-490.01 -905.51,-556.94 -905.51,-956.69 v2(-893.7,-968.5) ; J10.2@-800,-1106.3 J10.2@-800,-1100 -800,-1062.2 v2(-893.7,-968.5) ; C57.1@-657.48,-259.84 -633.86,-259.84 -618.11,-275.59 ; U6.8@-579.21,-330.71 -579.21,-314.49 -618.11,-275.59 ; v1(-570.87,-275.59) -618.11,-275.59 ; J9.1@-400,-1200 -444.09,-1200 -492.13,-1248.03 -881.89,-1248.03 -929.13,-1200.79 -929.13,-1003.94 v2(-893.7,-968.5)
  Top Layer w16: R10.2@-397.64,122.03 -354.31,165.35 v2@-236.22,165.35 ; v2(303.15,169.29) 338.58,169.29 370.08,137.79 v1(433.07,137.8) 468.5,102.36 529.83,102.36 572,144.53 v1(572,145) ; v2(685.04,-255.91) 682.28,-253.15 RP6.4.2@682.28,-215.04 RP6.3.2@717.28,-215.04 RP6.2.2@747.28,-215.04 RP6.1.2@782.28,-215.04
  Top Layer w20: v1(582.68,822.83) v1(582.68,854.33)
  Top Layer w24: v1(582.68,822.83) 562.99,803.15 503.94,803.15 464.57,763.78 464.57,633.86 582.68,515.75 C10.1@594.49,515.75
  Top Layer w24.02: LED3.5@-251.97,98.42 -251.97,149.61 v2@-236.22,165.35 ; v2@-232.28,169.29 v2(-220.47,169.29) ; LED2.5@251.97,98.42 251.97,141.73 279.53,169.29
  Mid-Layer 1 w20: v1(582.68,822.83) v1(582.68,854.33)
  Mid-Layer 1 w24: v2(303.15,169.29) 503.94,169.29 556.37,221.72 556.37,330.63 528.81,358.19 528.81,631.81 610.24,713.24 610.24,795.28 v1(582.68,822.83)
  Bottom Layer w10.01: U1.102@514.76,874.02 562.99,874.02 v1(582.68,854.33)
  Bottom Layer w15.98: v2(-972.44,-417.32) C50.1@-893.7,-417.32 ; v2(-893.7,-968.5) -893.7,-830.71 -846.46,-783.47 U3.4@-788.39,-783.47 -736.22,-783.47 -712.6,-759.84 ; U3.6@-788.39,-720.47 -740.16,-720.47 -712.6,-748.03 -712.6,-759.84 ; C48.1@-287.4,-748.03 -287.4,-720.47 -318.9,-688.98 -385.83,-688.98 U3.18@-463.58,-688.98 -500,-688.98 -527.56,-716.54 -527.56,-744.09 -539.37,-755.91 -708.66,-755.91 -712.6,-759.84
  Bottom Layer w16: U5.5@377.95,90.55 421.24,90.55 ; v1(433.07,137.8) 433.07,102.38 421.24,90.55 ; C56.2@448.82,62.98 421.24,90.55 ; v1(572,145) 572,144.53 602.36,114.17 U4.5@602.36,90.55 618.11,90.55 629.92,78.74 629.92,-200.79 v2(685.04,-255.91) 842.52,-413.39 842.52,-819.21 RP8.1.2@798.03,-863.7 RP8.2.2@763.03,-863.7 RP8.3.2@733.03,-863.7 RP8.4.2@698.03,-863.7
  Bottom Layer w20: v1(582.68,822.83) v1(582.68,854.33)
  Bottom Layer w50: C50.1@-893.7,-417.32 C51.1@-724.41,-417.32 -648,-340.91 L8.1@-648,-278 -640.1,-285.9 -455.2,-285.9 -255.91,-86.61 -255.91,125.98 v2@-224.41,157.48 ; v2@-216.54,165.35 -212.6,169.29 v2(303.15,169.29)
5VIN: J6.1 L5.1 L8.2 Z1.2 | length 623.1
  Bottom Layer w50: J6.1@-1185.04,-232.28 -771.65,-232.28 ; L8.2@-748,-278 L5.1@-748.03,-204.73 -748.03,-140.63 Z1.2@-696.85,-89.45
A0: U1.76 U2.29 | length 1659.1
  Top Layer w6: v1@118.11,850.39 v1(122.05,850.39)
  Mid-Layer 1 w6: v1(-960.63,496.06) -960.63,535.43 -950.42,545.64 -936.28,531.5 -927.79,539.99 -941.93,554.13 -933.45,562.61 -921.67,550.84 -913.19,559.32 -924.96,571.1 -916.48,579.58 -904.7,567.81 -896.22,576.3 -907.99,588.07 -899.51,596.56 -887.73,584.78 -879.25,593.27 -891.02,605.04 -818.9,677.17 -331.28,677.17 -273.73,734.72 -163.78,734.72 -124.13,734.72 -47.82,811.02 94.49,811.02 122.05,838.58 v1(122.05,850.39)
  Bottom Layer w6: U2.29@-960.63,406.5 v1(-960.63,496.06) ; v1(122.05,850.39) 122.05,854.33 145.67,877.95 U1.76@145.67,1006.89
A1: U1.75 U2.30 | length 1657.3
  Mid-Layer 1 w6: v1(-984.25,515.75) -986.22,515.75 -986.22,525.59 -943.43,568.38 -953.37,578.32 -944.88,586.81 -934.94,576.87 -926.46,585.36 -936.39,595.29 -927.91,603.78 -917.97,593.84 -909.48,602.33 -919.42,612.27 -910.94,620.75 -901,610.81 -892.51,619.3 -902.45,629.24 -893.97,637.72 -884.03,627.78 -875.54,636.27 -885.48,646.21 -877,654.69 -867.06,644.75 -823.65,688.17 -335.84,688.17 -278.28,745.72 -159.23,745.72 ; -159.22,745.72 -128.68,745.72 27.99,902.39 89.74,902.39 106.43,885.7 v1(118.69,885.7)
  Bottom Layer w6: U2.30@-986.22,406.5 -986.22,515.75 v1(-984.25,515.75) ; v1(118.69,885.7) 118.69,890.35 129.92,901.57 U1.75@129.92,1006.89
A2: U1.74 U2.31 | length 1660.8
  Mid-Layer 1 w6: v1(-1011.81,492.13) -1011.81,535.43 -970.03,577.21 -979.36,586.54 -970.88,595.03 -961.55,585.7 -948.51,598.73 -961.33,611.55 -952.84,620.03 -940.03,607.22 -931.54,615.7 -944.36,628.52 -935.87,637 -923.06,624.19 -914.57,632.67 -927.39,645.49 -918.9,653.97 -906.09,641.16 -897.6,649.64 -910.42,662.46 -901.93,670.94 -889.12,658.13 -848.08,699.17 -340.4,699.17 -282.84,756.72 -154.67,756.72 -133.24,756.72 23.43,913.39 87.55,913.39 v1(99.49,925.32)
  Bottom Layer w6: U2.31@-1011.81,406.5 v1(-1011.81,492.13) ; v1(99.49,925.32) 99.49,930.2 114.17,944.88 U1.74@114.17,1006.89
A3: U1.73 U2.32 | length 1660.8
  Mid-Layer 1 w6: v1(-1037.4,515.75) -1037.4,557.09 -1022.71,571.78 -1011.22,560.3 -1002.73,568.78 -1025.71,591.75 -1017.22,600.24 -1005.73,588.75 -997.25,597.24 -1008.74,608.72 -1000.25,617.21 -988.76,605.72 -980.28,614.21 -991.76,625.7 -983.28,634.18 -971.79,622.69 -963.31,631.18 -974.79,642.67 -966.31,651.15 -954.82,639.67 -884.32,710.17 -344.95,710.17 -287.4,767.72 -150.11,767.72 -137.8,767.72 31.5,937.01 v1(70.87,937.01)
  Bottom Layer w6: U2.32@-1037.4,406.5 -1037.4,513.78 -1036.42,514.76 v1@-1035.43,515.75 ; v1(70.87,937.01) 98.43,964.57 U1.73@98.43,1006.89
A4: U1.72 U2.35 | length 1657.9
  Top Layer w6: v1(-1035.43,933.07) -822.71,1145.8 -532.08,1145.8 -532.08,1135.8 -520.08,1135.8 -520.08,1155.8 -508.08,1155.8 -508.08,1135.8 -496.08,1135.8 -496.08,1155.8 -484.08,1155.8 -484.08,1135.8 -472.08,1135.8 -472.08,1155.8 -460.08,1155.8 -460.08,1135.8 -448.08,1135.8 -448.08,1155.8 -436.08,1155.8 -436.08,1135.8 -424.08,1135.8 -424.08,1155.8 -412.08,1155.8 -412.08,1135.8 -400.08,1135.8 -400.08,1155.8 -388.08,1155.8 -388.08,1135.8 -376.08,1135.8 -376.08,1145.8 -102.49,1145.8 v1(-90.55,1133.86)
  Bottom Layer w6: U2.35@-1037.4,853.35 -1035.43,855.32 v1(-1035.43,933.07) ; v1(-90.55,1133.86) 47.24,1133.86 82.68,1098.43 U1.72@82.68,1006.89
A5: U1.71 U2.36 | length 1658
  Top Layer w6: v1(-1011.81,909.45) -1011.81,933.53 -823.29,1122.05 -805.02,1122.05 -805.02,1134.19 -793.02,1134.19 -793.02,1102.66 -781.02,1102.66 -781.02,1134.19 -769.02,1134.19 -769.02,1102.66 -757.02,1102.66 -757.02,1134.19 -745.02,1134.19 -745.02,1102.66 -733.02,1102.66 -733.02,1134.19 -721.02,1134.19 -721.02,1102.66 -709.02,1102.66 -709.02,1134.19 -697.02,1134.19 -697.02,1122.05 -665.72,1122.05 -649.85,1106.17 -586.74,1106.17 -574.8,1118.11 -203.23,1118.11 -203.23,1130.11 -191.23,1130.11 -191.23,1118.11 -149.6,1118.11 v1@-143.7,1112.21
  Bottom Layer w6: U2.36@-1011.81,853.35 -1011.81,901.58 -1007.87,905.51 -1003.94,909.45 v1(-1011.81,909.45) ; v1@-145.67,1114.05 -141.73,1114.05 43.43,1114.05 66.93,1090.55 U1.71@66.93,1006.89
  other v1: -141.73,1114.17
A6: U1.70 U2.37 | length 1645.9
  Top Layer w6: v1(-984.25,933.07) -826.77,1090.55 -556.99,1090.55 -556.99,1106.27 -544.99,1106.27 -544.99,1090.55 -532.99,1090.55 -532.99,1106.27 -520.99,1106.27 -520.99,1090.55 -508.99,1090.55 -508.99,1106.27 -496.99,1106.27 -496.99,1090.55 -484.99,1090.55 -484.99,1106.27 -472.99,1106.27 -472.99,1090.55 -460.99,1090.55 -460.99,1106.27 -448.99,1106.27 -448.99,1090.55 -436.99,1090.55 -436.99,1106.27 -424.99,1106.27 -424.99,1090.55 -412.99,1090.55 -412.99,1106.27 -400.99,1106.27 -400.99,1090.55 -388.99,1090.55 -388.99,1106.27 -376.99,1106.27 -376.99,1090.55 -364.99,1090.55 -364.99,1106.27 -352.99,1106.27 -352.99,1090.55 -340.99,1090.55 -340.99,1106.27 -328.99,1106.27 -328.99,1090.55 -316.99,1090.55 -316.99,1106.27 -304.99,1106.27 -304.99,1090.55 -292.99,1090.55 -292.99,1106.27 -280.99,1106.27 -280.99,1090.55 v1(-196.85,1090.55)
  Bottom Layer w6: U2.37@-985.36,853.35 U2.37@-986.22,853.35 -986.22,931.1 v1(-984.25,933.07) ; v1(-196.85,1090.55) -196.72,1090.42 -118.24,1090.42 -106.3,1102.36 27.56,1102.36 51.18,1078.74 U1.70@51.18,1006.89
A7: U1.69 U2.38 | length 1645.9
  Top Layer w6: v1(-960.63,909.45) -960.63,933.53 -823.29,1070.87 -803.62,1070.87 -803.48,1071.01 -787.07,1071.01 -786.93,1070.87 -638.6,1070.87 -638.6,1058.79 -626.6,1058.79 -626.6,1070.87 -614.6,1070.87 -614.6,1058.79 -602.6,1058.79 -602.6,1070.87 -590.6,1070.87 -590.6,1058.79 -578.6,1058.79 -578.6,1070.87 -566.6,1070.87 -566.6,1058.79 -554.6,1058.79 -554.6,1070.87 -542.6,1070.87 -542.6,1058.79 -530.6,1058.79 -530.6,1070.87 -518.6,1070.87 -518.6,1058.79 -488.6,1058.79 -488.6,1077.69 -476.6,1077.69 -476.6,1058.79 -464.6,1058.79 -464.6,1077.69 -452.6,1077.69 -452.6,1058.79 -440.6,1058.79 -440.6,1077.69 -428.6,1077.69 -428.6,1058.79 -416.6,1058.79 -416.6,1077.69 -404.6,1077.69 -404.6,1058.79 -392.6,1058.79 -392.6,1077.69 -380.6,1077.69 -380.6,1058.79 -368.6,1058.79 -368.6,1077.69 -356.6,1077.69 -356.6,1058.79 -344.6,1058.79 -344.6,1077.69 -332.6,1077.69 -332.6,1058.79 -320.6,1058.79 -320.6,1077.69 -308.6,1077.69 -308.6,1058.79 -228.61,1058.79 -216.66,1070.74 v1@-145.54,1070.74
  Bottom Layer w6: U2.38@-960.63,853.35 v1(-960.63,909.45) ; v1(-141.73,1066.93) -118.11,1066.93 -98.43,1086.61 15.75,1086.61 35.43,1066.93 U1.69@35.43,1006.89